# Altium PCB PCB1.PcbDoc (part 4 of 7)
Units mm, origin at the board's own origin, x right, y up, seen from the top; angles counter-clockwise.
Board outline 168 x 107.92 mm, 4 copper layers (Top Layer, POWER_LAYER, GND_LAYER, Bottom Layer), stack 1.182 mm thick; 507 components, 566 nets, 2495 pads, 1244 vias.
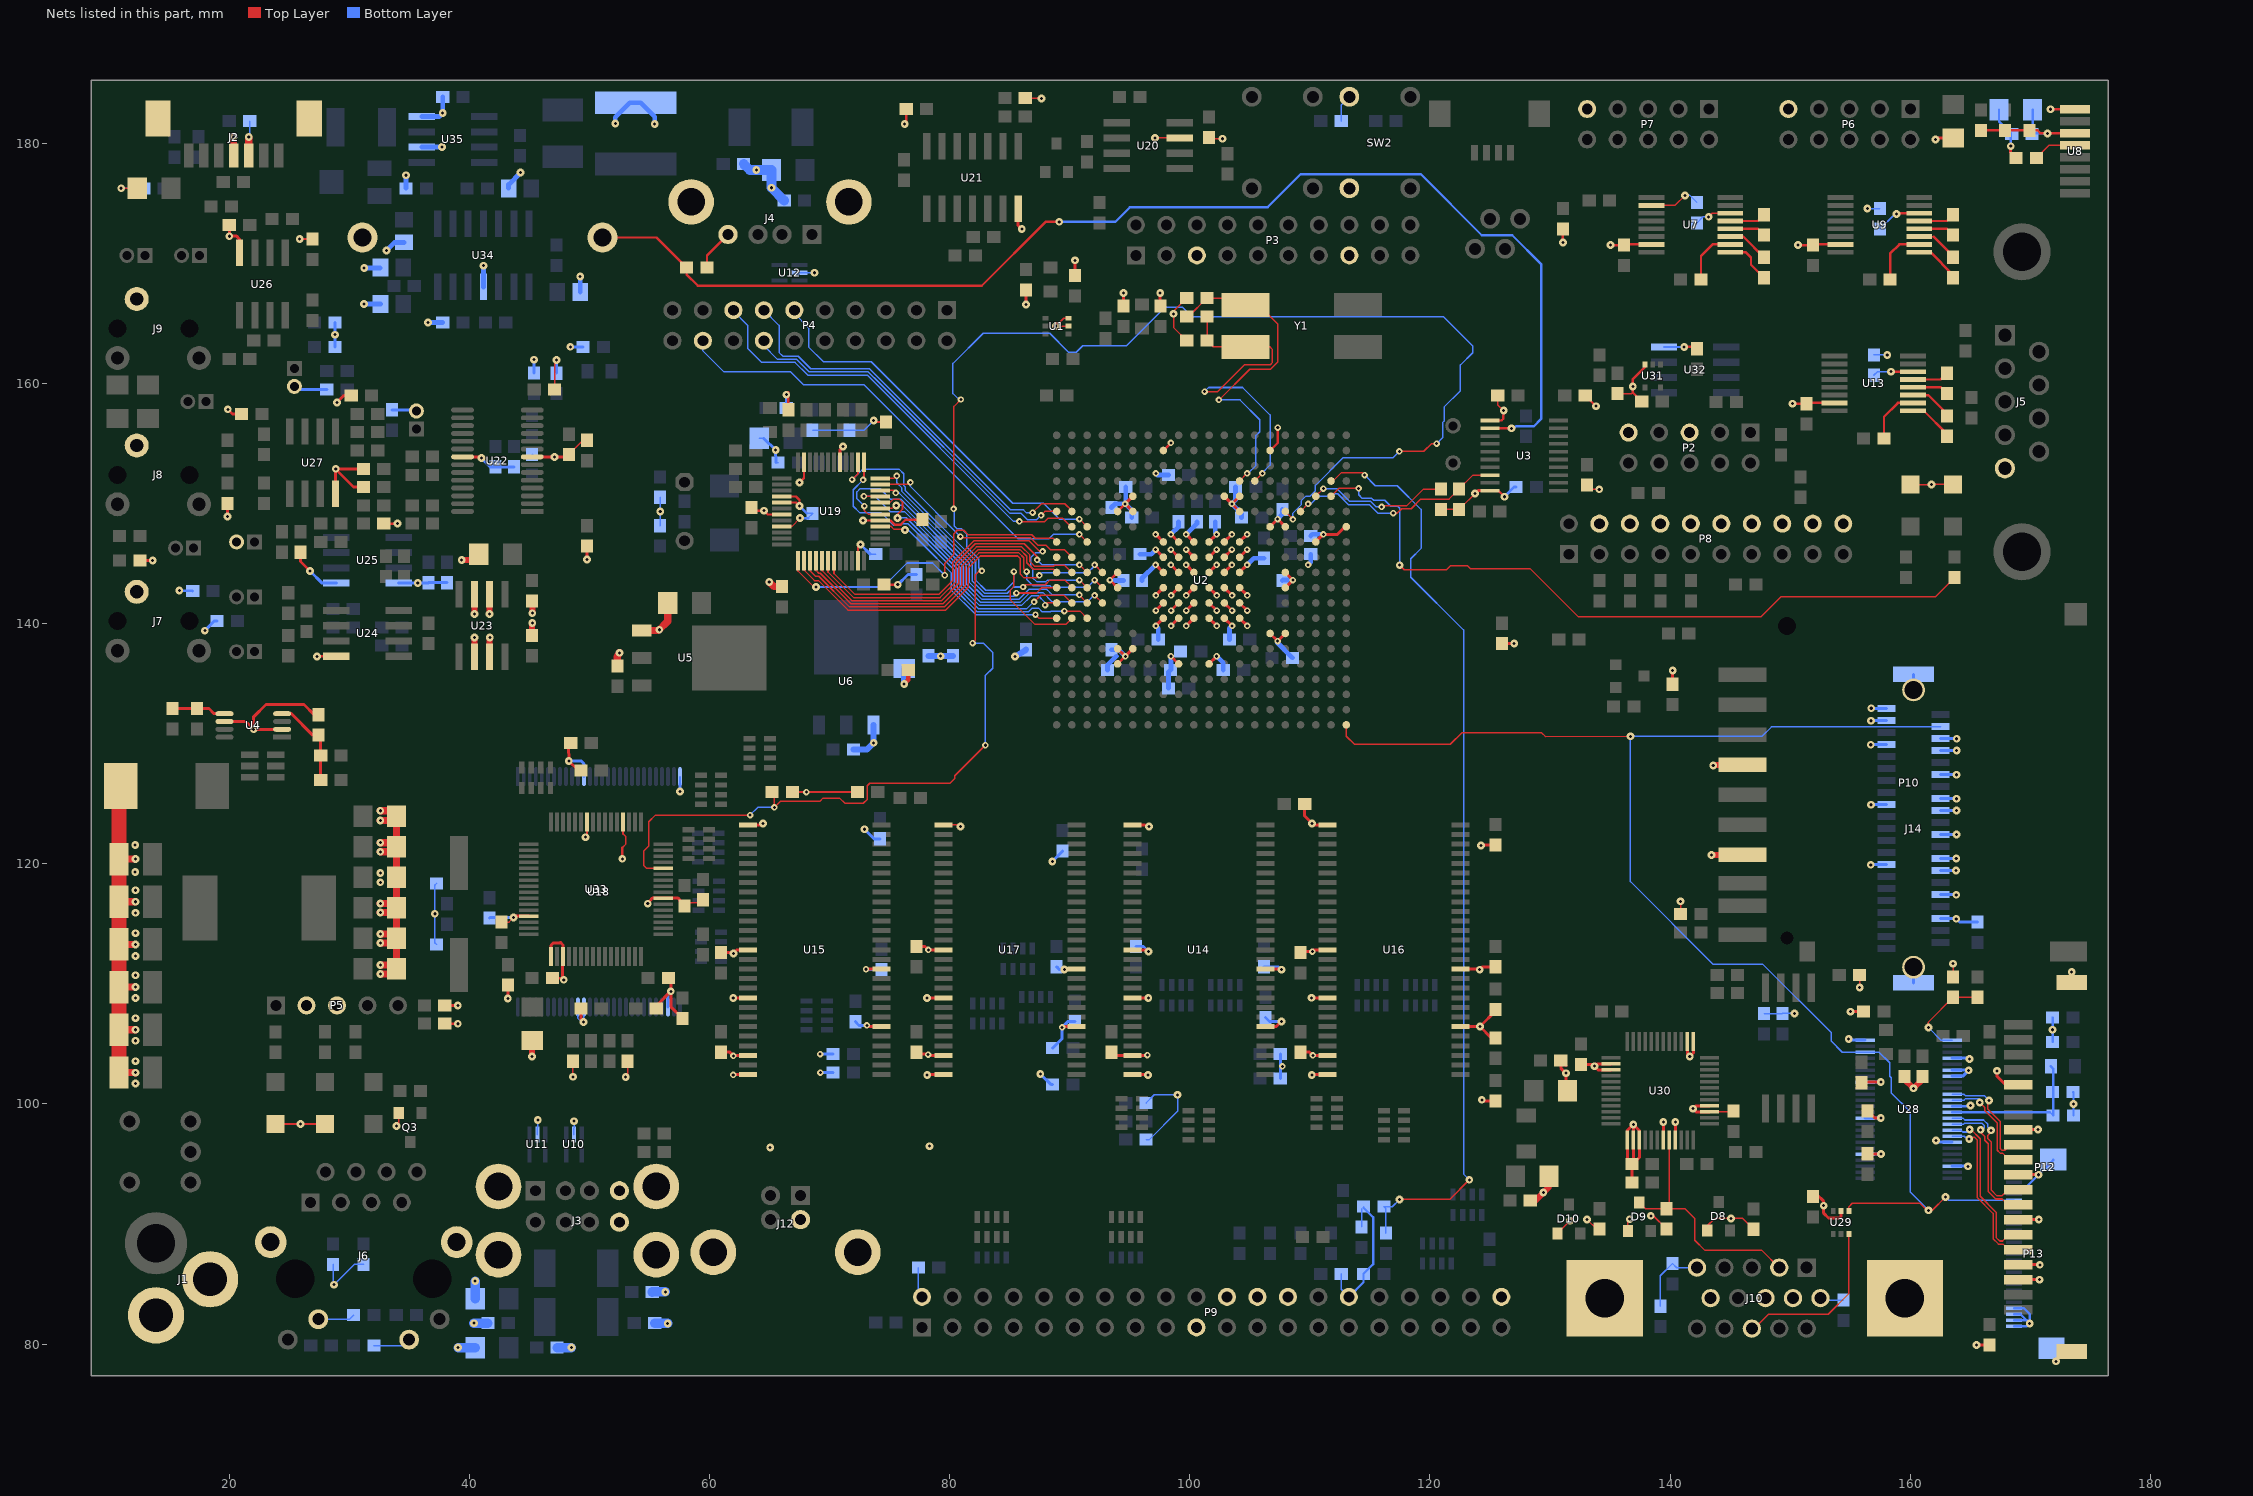
[diagram p6: the nets of this part, all layers, seen from the top]

## Via types
v1: diameter 0.54, hole 0.254, Top Layer to Bottom Layer, tented both sides, 504 vias
v2: diameter 0.65, hole 0.254, Top Layer to Bottom Layer, 387 vias
v3: diameter 0.65, hole 0.254, Top Layer to Bottom Layer, tented both sides, 325 vias
v4: diameter 0.54, hole 0.254, Top Layer to Bottom Layer, 25 vias
v5: diameter 1.27, hole 0.75, Top Layer to Bottom Layer, 2 vias
v6: diameter 0.65, hole 0.254, Top Layer to Bottom Layer, tented bottom, 1 vias

## Nets (pads, with @x,y where several pads share a name; then routed paths per layer and width w, separated by ;. In a path a pad name is that pad's centre, name@x,y a point inside that pad or via, vN(x,y) a via of type N, cw(c..) or ccw(c..) an arc to the next point about the centre after c; other vN are vias at no path point) (continued)
GND: B1.- C1.1 C2.1 C3.1 C4.1 C5.1 C6.1 C8.2 C9.1 C10.2 C11.1 C12.1 C13.2 C14.1 C15.2 C16.1 C17.1 C18.1 C19.2 C20.1 C21.2 C22.1 C24.2 C25.1 C26.2 C27.1 C28.1 C29.2 C30.1 C31.2 C32.1 C34.2 C35.1 C36.2 C37.1 C38.1 C39.1 C40.2 C41.1 C42.2 C43.1 C45.2 C46.1 C47.2 C48.1 C49.1 C50.1 C52.1 C53.1 C54.1 C55.1 C56.1 C57.1 C58.1 C59.1 C60.1 C61.1 C63.1 C64.1 C65.1 C66.1 C67.1 C68.1 C69.1 C70.1 C73.1 C74.1 C76.1 C77.1 C78.2 C82.1 C83.2 C87.1 C88.2 C89.1 C90.1 C91.1 C92.1 C93.1 C94.1 C95.1 C96.1 C97.1 C98.1 C99.2 C100.1 C101.2 C102.1 C103.2 C104.1 C105.2 C106.1 C107.2 C108.1 C109.2 C110.1 C111.2 C112.1 C113.2 C114.1 C115.2 C116.1 C117.2 C118.1 C119.2 C120.1 C121.2 C122.1 C123.2 C124.1 C125.2 C126.1 C127.1 C128.1 C129.1 C130.1 C131.1 C132.1 C133.1 C134.1 C135.1 C136.1 C137.1 C138.1 C139.1 C140.1 C141.1 C142.1 C144.1 C145.1 C146.1 C151.2 C152.1 C155.2 C156.1 C157.2 C158.1 C159.2 C160.2 C161.2 C162.2 C165.1 C166.2 C167.2 C168.2 C169.2 C170.2 C171.1 C172.1 C173.2 C175.1 C177.1 C178.1 C183.1 C184.2 C185.2 C186.2 C187.2 C188.2 C189.1 C190.2 C191.1 C192.2 C193.1 C194.2 C195.1 C196.2 C197.1 C198.1 C199.2 C200.2 C202.2 C203.2 C204.1 C206.2 C207.1 C208.1 C209.2 C210.2 C211.1 C212.2 C213.2 C214.2 C215.2 C216.2 C217.2 C218.2 C219.2 C220.2 C221.2 C222.2 C223.2 C224.1 C225.2 D1.2 D2.2 D3.1 D5.2 D6.2 D8.1 D9.1 D10.1 J1.2 J1.3 J2.3 J2.4 J2.8 J2.9 J3.4 J3.8 J3.9 J3.10 J3.11 J3.12 J4.4 J4.5 J4.6 J5.5 J6.10 J6.11 J6.13 J6.14 J7.3 J8.3 J9.3 J10.5 J10.6 J10.7 J10.8 J10.10 J10.16 J10.17 J12.4 J12.5 J12.6 J14.1 J14.3 J14.6 J14.7 J14.8 J14.12 J14.16 J14.17 J14.18 J14.22 J14.26 J14.27 J14.28 J14.32 J14.36 J14.42 J14.42_1 J14.43 J14.43_1 P2.5 P2.9 P3.5 P3.15 P5.2 P5.3 P6.9 P7.9 P8.4 P8.6 P8.8 P8.10 P8.12 P8.14 P8.16 P8.18 P8.20 P9.2 P9.19 P9.22 P9.24 P9.26 P9.30 P9.40 P10.3 P10.6 P12.3 P12.4 P12.7 P12.10 P12.13 P12.16 P12.21 P12.22 P13.2 P13.22 P13.23 P13.24 P13.25 P13.26 P13.27 Q3.2 R7.1 R8.1 R9.1 R10.1 R11.1 R14.1 R19.2 R20.2 R21.2 R22.2 R27.2 R32.2 R33.2 R34.2 R51.2 R61.2 R62.2 R64.1 R73.1 R79.1 R81.1 R83.2 R85.1 R95.1 R100.2 R101.1 R102.1 R103.1 R127.1 R131.1 R132.1 R133.1 R134.1 R135.1 R137.1 R138.1 R139.1 R140.1 R142.1 R145.1 R146.1 R148.1 R152.2 R154.1 R156.2 R157.2 R159.2 R160.1 R167.1 R169.1 SW2.2 SW2.3 U1.2 U1.3 U2.E5 U2.E6 U2.E10 U2.E11 U2.E15 U2.F6 U2.F15 U2.F16 U2.H8 U2.H9 U2.H10 U2.H11 U2.H12 U2.H13 U2.H19 U2.J5 U2.J8 U2.J9 U2.J10 U2.J11 U2.J12 U2.J13 U2.K8 U2.K9 U2.K10 U2.K11 U2.K12 U2.K13 U2.L5 U2.L8 U2.L9 U2.L10 U2.L11 U2.L12 U2.L13 U2.M8 U2.M9 U2.M10 U2.M11 U2.M12 U2.M13 U2.M16 U2.N8 U2.N9 U2.N10 U2.N11 U2.N12 U2.N13 U2.N15 U2.N16 U2.R7 U2.R14 U2.R19 U2.T7 U2.T10 U2.T11 U2.T14 U2.V13 U2.Y14 U3.1 U3.10 U4.2 U4.6 U5.1 U6.1 U7.10 U7.15 U8.8 U9.15 U10.2 U11.2 U12.2 U13.15 U14.6 U14.12 U14.28 U14.41 U14.46 U14.52 U14.54 U15.6 U15.12 U15.28 U15.41 U15.46 U15.52 U15.54 U16.6 U16.12 U16.28 U16.41 U16.46 U16.52 U16.54 U17.6 U17.12 U17.28 U17.41 U17.46 U17.52 U17.54 U18.12 U18.28 U18.31 U18.45 U18.46 U19.11 U19.17 U19.29 U19.35 U19.40 U19.41 U19.43 U19.45 U20.3 U21.7 U22.8 U22.21 U23.2 U23.3 U23.6 U23.7 U24.4 U25.4 U25.5 U26.4 U27.4 U28.5 U28.11 U28.17 U28.24 U28.28 U28.30 U28.31 U28.36 U28.42 U28.46 U29.2 U30.1 U30.2 U30.14 U30.15 U30.25 U30.26 U30.27 U30.31 U30.33 U30.39 U30.40 U31.3 U32.4 U33.1 U33.3 U33.23 U33.36 U33.42 U33.61 U34.11 U35.2 U35.4 | length 717.6
  Top Layer w0.127: v2(10.976,176.276) C59.1@12.316,176.276 ; D5.2@23.828,98.322 23.832,98.326 D6.2@27.94,98.326 ; v2(33.9,98.16) 34.102,98.362 Q3.2@34.102,99.244 ; R159.2@42.672,115.15 43.29,115.15 v2(43.66,115.52) ; R102.1@47.078,159.512 47.078,161.818 v2(47.24,161.98) ; U33.3@47.72,112.227 U33.3@47.78,112.287 ; C146.1@48.26,154.09 49.452,155.282 R19.2@49.784,155.282 ; R152.2@48.598,103.563 48.598,102.405 v2(48.6,102.26) ; v2@49.272,107.031 v2(49.482,106.821) ; v2(49.662,122.221) v2@49.78,122.339 ; 52.722,121.341 53.022,121.641 53.022,122.261 52.78,122.503 ; v2(53.002,102.241) 53.17,102.409 R156.2@53.17,103.563 ; C126.1@55.544,107.969 C126.1@55.544,108.163 ; R157.2@56.56,110.509 56.754,110.509 R157.2@56.762,110.501 ; C217.2@57.742,116.771 59.201,116.771 R160.1@59.436,117.006 ; U19.45@66.004,148.102 66.862,148.102 v2(67.52,148.8) ; R8.1@67.336,125.984 R20.2@72.302,125.984 ; v2@73.774,156.92 v2(73.66,156.92) 73.774,156.806 R51.2@74.676,156.806 ; v2(75.664,143.256) v2@75.7,143.22 ; v2(76.24,181.64) v2@76.366,181.766 ; U17.28@79.458,123.24 80.78,123.24 v2(80.9,123.12) ; C144.1@86.294,183.776 87.624,183.776 v2(87.64,183.76) ; v2(86.34,166.6) v2@86.36,166.62 ; U1.2@89.874,164.794 v2(88.846,164.794) 89.496,165.444 U1.3@89.874,165.444 ; 96.28,123.24 v2(96.6,123.12) ; v3(97.1,180.46) 97.107,180.467 U20.3@99.145,180.467 ; U2.H19@97.79,154.432 U2.H19@97.79,154.44 ; C1.1@99.734,163.576 99.734,163.586 98.64,164.68 v3(98.64,165.82) 98.62,166 C2.1@99.734,167.132 ; R64.1@101.6,180.506 101.706,180.4 v2(102.72,180.4) ; U2.R19@106.68,154.432 U2.R19@106.692,154.432 ; U2.V13@110.49,146.812 U2.V13@110.49,146.82 ; U2.Y14@112.922,148.082 U2.Y14@113.03,148.082 ; R10.1@120.904,149.518 R9.1@122.428,149.518 v2@123.992,151.082 ; R14.1@125.642,159.004 125.642,158.218 v2(126.14,157.76) ; D10.1@130.622,89.224 v2(131.658,90.26) ; C4.1@132.93,159.004 C4.1@132.936,159.004 ; v2(133.08,90.38) 133.886,89.574 R139.1@134.112,89.574 ; R7.1@133.096,151.55 133.446,151.2 v2(134.1,151.2) ; R154.1@135.636,159.17 136.824,159.17 136.9,159.246 ; C83.2@136.144,171.538 C83.2@136.209,171.603 ; U30.25@136.442,96.992 U30.25@136.442,97.782 ; D9.1@136.486,89.4 136.486,90.246 v2(136.64,90.4) ; U30.27@137.442,96.992 U30.27@137.442,97.778 ; U31.3@137.912,161.392 U31.3@137.912,161.594 ; v2(138.4,90.68) 138.594,90.68 R138.1@139.7,89.574 ; U7.10@138.457,174.853 140.413,174.853 v2(141.24,175.68) ; v2(139.44,98.5) v2@139.442,98.498 ; v2(140.44,98.5) v2@140.442,98.498 ; v2(140.88,116.88) 140.882,116.878 R95.1@140.882,115.824 ; C209.2@142.082,163.06 C209.2@142.24,162.902 ; D8.1@143.102,89.436 143.102,89.842 143.72,90.46 146.05,90.46 R137.1@146.956,89.554 ; U30.39@143.292,99.342 R148.1@145.228,99.342 ; v2@150.66,171.54 v2(150.662,171.538) ; R142.1@155.79,110.744 155.8,110.734 v2(155.8,109.7) ; D2.2@160.02,151.61 160.07,151.56 161.74,151.56 v2(161.79,151.61) D1.2@163.576,151.61 ; v2(163.56,111.68) 163.576,111.664 R140.1@163.576,110.578 ; v2(171.68,182.86) v2@171.692,182.848
  Top Layer w0.2: v2@19.812,148.968 v2(19.84,148.94) ; R131.1@19.812,149.998 R131.1@19.812,150.026 ; v2@19.978,172.282 19.978,172.242 v2@20.02,172.2 ; v2(25.846,172.046) C178.1@26.924,172.046 ; v2(27.28,137.28) U24.4@28.896,137.287 ; C167.2@32.854,148.336 33.996,148.336 v2(34,148.34) ; C41.1@37.934,106.68 v2(39.02,106.68) ; v2@49.78,122.339 U33.42@49.78,123.487 ; v2(52.722,120.421) 52.722,121.341 ; 52.78,122.503 U33.36@52.78,123.487 ; U33.23@56.127,117.137 U33.23@56.13,117.137 ; C5.1@59.778,169.672 59.778,170.684 J4.4@61.524,172.43 ; C216.2@63.5,149.694 63.774,149.42 v2(64.52,149.42) 64.838,149.102 U19.43@66.004,149.102 ; v2@64.52,149.36 v2@64.58,149.36 ; U19.41@66.004,150.102 67.178,150.102 v2(67.48,149.8) 67.48,150.3 67.178,150.602 U19.40@66.004,150.602 ; C136.1@66.548,157.822 v2@66.548,159.292 ; v2(67.48,151.76) 67.854,152.134 U19.35@67.854,153.452 ; U19.11@72.354,145.252 72.354,146.394 v2(72.56,146.6) ; v2(72.762,148.602) U19.17@74.204,148.602 75.058,148.602 75.4,148.26 75.92,148.26 76.32,148.66 C215.2@77.78,148.66 ; C135.1@74.51,143.256 v2(75.664,143.256) ; v2@76.366,181.766 C213.2@76.366,182.88 ; U2.H19@97.79,154.44 v1(98.42,155.07) ; U2.R19@106.692,154.432 107.32,155.06 v1(107.32,156.34) ; U3.1@125.008,156.932 125.952,156.932 126.1,157.08 v2(126.14,157.76) ; U3.10@125.008,151.082 125.698,151.082 v2(126.2,150.58) ; C190.2@128.358,91.948 C190.2@128.768,91.948 ; C193.1@129.924,93.104 C193.1@129.924,93.98 ; C18.1@131.064,172.886 131.064,171.776 v2(131.08,171.76) ; C4.1@132.936,159.004 v2(133.82,158.12) ; v2(135.04,171.54) C83.2@136.144,171.538 ; C83.2@136.209,171.603 U7.15@138.457,171.603 ; C210.2@137.65,158.496 136.9,159.246 136.9,160.38 U31.3@137.912,161.392 ; v2(141.18,163.06) C209.2@142.082,163.06 ; v2(150.19,158.33) C88.2@151.384,158.33 151.449,158.395 U13.15@153.697,158.395 ; v2(150.662,171.538) C78.2@151.892,171.538 151.957,171.603 U9.15@154.205,171.603 ; v2@171.692,182.848 U8.8@173.736,182.848
  Top Layer w0.25: R132.1@12.534,145.288 v2(13.6,145.28) ; U4.6@19.584,131.856 21.364,131.856 v2(22.014,131.206) ; v2(19.84,148.94) R131.1@19.84,149.998 ; v2(19.86,157.86) 20.24,157.48 C162.2@20.994,157.48 ; R127.1@19.978,173.228 19.978,172.282 v2(19.98,172.28) 20.6,172.28 20.84,172.04 U26.4@20.84,170.89 ; U4.2@24.384,131.206 v2(22.014,131.206) ; C171.1@25.908,145.962 25.908,145.192 v2(26.7,144.4) ; R32.2@27.432,132.422 27.058,132.422 26.2,133.28 23.04,133.28 22.014,132.254 v2(22.014,131.206) ; U27.4@28.829,150.816 v2@28.829,152.889 ; v2(28.96,158.44) 29.524,159.004 C168.2@30.138,159.004 ; C175.1@31.154,151.384 30.334,151.384 v2@28.829,152.889 ; C177.1@31.154,152.908 v2(28.848,152.908) v2@28.829,152.889 ; C39.1@37.934,108.204 v2(39.016,108.204) v2@39.06,108.16 ; U22.21@39.412,153.902 40.878,153.902 v2(40.98,153.8) ; U23.7@41.688,137.082 U23.7@41.687,137.242 ; v2(43.18,108.78) C212.2@43.18,109.894 ; v2(43.66,115.52) 43.777,115.637 U33.61@44.93,115.637 ; v2(45.2,103.96) v2@45.212,103.972 ; U22.8@45.212,153.902 48.072,153.902 C146.1@48.26,154.09 ; U33.1@46.78,112.287 46.78,113.212 46.982,113.414 47.516,113.414 47.562,113.461 47.78,113.243 U33.3@47.78,112.287 ; C218.2@47.189,110.509 v2@47.72,110.46 ; U33.3@47.72,112.227 v2@47.72,110.46 ; v2(47.84,110.34) v2@47.72,110.46 ; C129.1@48.09,129.813 48.24,129.82 v2(48.262,128.561) 49.062,127.781 C128.1@49.272,127.781 ; v2@49.272,107.03 C124.1@49.272,107.969 ; v2(49.78,145.36) 49.78,146.466 C20.1@49.784,146.47 ; v2(54.84,116.68) 55.217,117.137 57.376,117.137 C217.2@57.912,116.498 ; C126.1@55.544,108.163 v2(56.762,109.381) ; R157.2@56.762,110.501 56.762,108.099 C127.1@57.742,107.119 ; C100.1@60.96,104.306 61.674,104.306 v4(61.98,104) 62.02,104.04 U15.52@63.202,104.04 ; C99.2@60.96,112.61 61.91,112.61 v2(61.98,112.54) 62.28,112.84 U15.41@63.202,112.84 ; v4(61.96,102.42) 62.02,102.44 U15.54@63.202,102.44 ; v2(61.96,108.82) 61.98,108.84 U15.46@63.202,108.84 ; U15.28@63.202,123.24 64.32,123.24 v2(64.44,123.36) ; U19.29@70.854,153.452 70.854,154.514 v2(71.1,154.76) ; v4@73.04,111.24 U15.12@74.302,111.24 ; v4(73.1,106.54) 73.2,106.44 U15.6@74.302,106.44 ; C106.1@77.216,104.306 77.362,104.16 78.2,104.16 78.32,104.04 U17.52@79.458,104.04 ; C105.2@77.216,113.118 77.942,113.118 v4(78.22,112.84) U17.41@79.458,112.84 ; v2(78.1,108.82) 78.12,108.84 U17.46@79.458,108.84 ; v2(78.12,102.42) 78.26,102.44 U17.54@79.458,102.44 ; U21.7@85.698,174.572 85.698,173.182 v2(86,172.88) ; v2(86.34,166.6) 86.34,167.786 C53.1@86.36,167.806 ; v4(89.36,106.38) 89.42,106.44 U17.6@90.558,106.44 ; v2@90.4,170.3 v2(90.424,170.276) C55.1@90.424,168.998 ; C112.1@93.472,104.306 93.738,104.04 96.4,104.04 v4(96.46,104.06) ; U2.E5@93.98,136.652 U2.F6@95.25,137.922 95.25,137.914 v1(94.62,137.284) 94.618,137.284 U2.E6@93.98,137.922 ; U2.E10@93.98,143.002 93.978,143.002 v1(93.34,143.64) 93.348,143.64 U2.E11@93.98,144.272 ; U2.E15@93.98,149.352 U2.F16@95.25,150.622 95.242,150.622 v1(94.61,149.99) 94.612,149.99 U2.F15@95.25,149.352 ; v2(94.48,167.54) 94.488,167.532 C52.1@94.488,166.458 ; U14.54@95.206,102.44 96.38,102.44 v2(96.52,102.42) ; U14.41@95.206,112.84 96.42,112.84 v2(96.56,112.7) ; U14.46@95.22,108.82 v2(96.54,108.82) ; v1(97.15,144.91) 97.788,144.272 U2.H11@97.79,144.272 ; v1(97.15,146.18) 97.788,145.542 U2.H12@97.79,145.542 ; v1(97.15,147.45) 97.788,146.812 U2.H13@97.79,146.812 ; v1(97.16,139.824) 97.79,140.454 U2.H8@97.79,140.462 ; v1(97.16,141.094) 97.79,141.724 U2.H9@97.79,141.732 ; v1(97.16,142.364) 97.79,142.994 U2.H10@97.79,143.002 ; v2(97.528,167.54) C54.1@97.536,166.458 ; v1(98.42,137.29) 99.058,136.652 U2.J5@99.06,136.652 ; v1(98.42,144.91) 99.058,144.272 U2.J11@99.06,144.272 ; v1(98.42,146.18) 99.058,145.542 U2.J12@99.06,145.542 ; v1(98.42,147.45) 99.058,146.812 U2.J13@99.06,146.812 ; v1(98.43,139.824) 99.06,140.454 U2.J8@99.06,140.462 ; v1(98.43,141.094) 99.06,141.724 U2.J9@99.06,141.732 ; v1(98.43,142.364) 99.06,142.994 U2.J10@99.06,143.002 ; v1(99.69,144.91) 100.328,144.272 U2.K11@100.33,144.272 ; v1(99.69,146.18) 100.328,145.542 U2.K12@100.33,145.542 ; v1(99.69,147.45) 100.328,146.812 U2.K13@100.33,146.812 ; v1(99.7,139.824) 100.33,140.454 U2.K8@100.33,140.462 ; v1(99.7,141.094) 100.33,141.724 U2.K9@100.33,141.732 ; v1(99.7,142.364) 100.33,142.994 U2.K10@100.33,143.002 ; U2.L5@101.6,136.652 101.6,136.66 v1(102.23,137.29) ; U2.L8@101.6,140.462 101.602,140.462 v1(102.24,139.824) ; U2.L9@101.6,141.732 101.602,141.732 v1(102.24,141.094) ; U2.L10@101.6,143.002 101.602,143.002 v1(102.24,142.364) ; U2.L11@101.6,144.272 101.6,144.28 v1(102.23,144.91) ; U2.L12@101.6,145.542 101.6,145.55 v1(102.23,146.18) ; U2.L13@101.6,146.812 101.6,146.82 v1(102.23,147.45) ; U2.M8@102.87,140.462 102.872,140.462 v1(103.51,139.824) ; U2.M9@102.87,141.732 102.872,141.732 v1(103.51,141.094) ; U2.M10@102.87,143.002 102.872,143.002 v1(103.51,142.364) ; U2.M11@102.87,144.272 102.87,144.28 v1(103.5,144.91) ; U2.M12@102.87,145.542 102.87,145.55 v1(103.5,146.18) ; U2.M13@102.87,146.812 102.87,146.82 v1(103.5,147.45) ; U2.M16@102.87,150.622 U2.N15@104.14,149.352 104.138,149.352 v1(103.5,149.99) 103.508,149.99 U2.N16@104.14,150.622 ; U2.N8@104.14,140.462 104.142,140.462 v1(104.78,139.824) ; U2.N9@104.14,141.732 104.142,141.732 v1(104.78,141.094) ; U2.N10@104.14,143.002 104.142,143.002 v1(104.78,142.364) ; U2.N11@104.14,144.272 104.14,144.28 v1(104.77,144.91) ; U2.N13@104.14,146.812 104.14,146.82 v1(104.77,147.45) ; U2.N12@104.162,145.542 U2.N12@104.14,145.542 104.14,145.55 v1(104.77,146.18) ; U14.6@106.306,106.44 107.2,106.44 v2(107.62,106.86) ; U14.12@106.306,111.24 107.52,111.24 v2(107.64,111.18) ; U2.R7@106.68,139.192 107.31,138.562 v1(107.31,138.56) 107.942,139.192 U2.T7@107.95,139.192 ; U2.R14@106.68,148.082 106.68,148.09 v1(107.31,148.72) 107.312,148.72 U2.T14@107.95,148.082 ; U2.T10@107.95,143.002 108.58,143.632 v1(108.58,143.64) 107.95,144.27 U2.T11@107.95,144.272 ; C118.1@109.22,104.306 109.974,104.306 v4(110.24,104.04) U16.52@111.462,104.04 ; C117.2@109.22,112.61 109.22,112.66 109.2,112.68 v4(110.2,112.68) 110.36,112.84 U16.41@111.462,112.84 ; C110.1@109.562,124.968 109.562,123.978 110.3,123.24 U16.28@111.462,123.24 ; v2(110.12,108.84) U16.46@111.462,108.84 ; v2(110.16,102.4) 110.28,102.44 U16.54@111.462,102.44 ; U2.V13@110.49,146.82 v1(111.12,147.45) 112.29,147.45 U2.Y14@112.922,148.082 ; U16.6@122.562,106.44 v2(124.16,106.44) ; U16.12@122.562,111.24 124.08,111.24 v2(124.14,111.18) 124.378,111.418 C121.2@125.476,111.418 ; v2@123.992,151.082 U3.10@125.008,151.082 ; v2(124.24,121.52) 124.298,121.578 C116.1@125.476,121.578 ; v2(124.32,100.34) 124.418,100.242 C119.2@125.476,100.242 ; C120.1@125.476,105.498 125.102,105.498 v2(124.16,106.44) ; C61.1@125.476,107.862 125.476,107.756 v2(124.16,106.44) ; C28.1@125.984,138.342 v2(127.018,138.342) v2@127.04,138.32 ; C199.2@131.32,103.21 C199.2@130.898,103.632 130.898,102.982 v2(131.32,102.56) 131.32,101.22 C69.1@131.448,101.092 ; C200.2@132.588,103.29 133.55,103.29 133.998,102.842 U30.15@135.092,102.842 ; v2(133.7,103.14) 133.902,103.342 U30.14@135.092,103.342 ; C203.2@136.442,95.042 U30.25@136.442,96.992 ; U30.25@136.442,97.782 v2(136.94,98.28) v2@136.942,98.278 ; C206.2@136.818,93.472 C203.2@136.818,94.996 136.942,95.12 U30.26@136.942,96.992 v2@136.942,98.278 ; C203.2@137.28,95.38 137.442,95.542 U30.27@137.442,96.992 ; U30.27@137.442,97.778 v2@136.942,98.278 ; U30.31@139.442,96.992 v2@139.442,98.498 ; C145.1@140.208,134.962 140.208,136.088 v2(140.22,136.1) ; U30.33@140.442,96.992 v2@140.442,98.498 ; U30.2@141.442,105.192 141.442,104.138 v2(141.64,103.94) 141.942,104.242 U30.1@141.942,105.192 ; U30.39@143.292,99.342 142.178,99.342 v2(141.92,99.6) 142.162,99.842 U30.40@143.292,99.842 ; R148.1@145.228,99.342 R148.1@145.288,99.402 ; C187.2@152.234,92.456 152.8,91.89 152.8,90.899 153.202,90.497 154.137,90.497 154.25,90.61 U29.2@154.25,91.082 ; v2(155.04,107.68) 155.056,107.696 C194.2@156.122,107.696 ; C192.2@155.956,101.766 156.01,101.82 v2(157.56,101.82) ; C195.1@156.464,95.846 157.554,95.846 v2(157.58,95.82) ; C189.1@156.464,99.402 157.046,98.82 v2(157.56,98.82) ; v2(162.12,180.34) 162.244,180.464 C73.1@163.576,180.464 ; v2(165.54,79.92) 165.542,79.922 C186.2@166.624,79.922 ; v2(167.24,102.76) 167.24,102.3 167.93,101.61 P12.16@169.013,101.61 ; v2(168.38,179.78) 168.38,179.258 R34.2@168.822,178.816 ; P12.3@169.013,85.36 v2(170.78,85.36) ; P12.4@169.013,86.61 170.79,86.61 v2(170.8,86.6) ; P12.7@169.013,90.36 v2(170.72,90.36) ; P12.10@169.013,94.11 170.69,94.11 v2(170.7,94.1) ; P12.13@169.013,97.86 v2(170.66,97.86)
  Top Layer w0.254: U14.28@95.206,123.24 96.28,123.24
  Top Layer w0.4: v2(76.2,134.98) 76.542,135.322 C32.1@76.542,136.144
  Top Layer w0.5: v2(39.34,145.32) 40.288,145.32 C68.1@40.764,145.796 ; U23.6@40.398,137.242 40.398,138.858 v2(40.4,138.86) ; U23.3@40.398,142.442 40.398,140.822 v2(40.4,140.82) ; v2(41.66,140.82) 41.668,140.828 U23.2@41.668,142.442 ; U23.7@41.668,137.242 41.668,138.848 v2(41.68,138.86) ; v2@45.212,103.972 C211.1@45.212,105.28 ; C151.2@45.212,139.026 45.212,140.052 v2(45.22,140.06) ; C155.2@45.212,141.898 45.22,141.89 v2(45.22,140.88) ; C190.2@128.768,91.948 C193.1@129.924,93.104 ; v2(143.46,120.74) 143.467,120.747 P10.6@146.043,120.747 ; v2(143.6,128.2) 143.647,128.247 P10.3@146.043,128.247 ; C204.1@159.512,102.274 159.512,102.068 v2(160.28,101.3) 161.036,102.056 C202.2@161.036,102.274
  Top Layer w0.6: C38.1@10.792,102.616 12.144,102.616 v2(12.16,102.6) ; C50.1@10.792,106.172 12.152,106.172 v2(12.16,106.18) ; C49.1@10.792,109.728 12.148,109.728 v2(12.16,109.74) ; C17.1@10.792,113.284 12.156,113.284 v2(12.16,113.28) ; C6.1@10.792,116.84 v2(12.16,116.84) ; C56.1@10.792,120.396 12.156,120.396 v2(12.16,120.4) ; v2(20.34,180.56) J2.4@20.342,178.988 ; J2.3@21.592,178.988 v2(21.6,180.54) ; v2(32.56,110.82) 33.48,110.82 C57.1@33.912,111.252 ; v2(32.56,111.58) 33.584,111.58 C57.1@33.912,111.252 ; v2(32.56,113.4) 33.52,113.4 C67.1@33.912,113.792 33.544,114.16 v2(32.56,114.16) ; v2(32.56,115.94) 33.52,115.94 C152.1@33.912,116.332 33.544,116.7 v2(32.56,116.7) ; v2(32.56,121) 33.5,121 C197.1@33.912,121.412 33.564,121.76 v2(32.56,121.76) ; v2(32.56,123.6) 33.56,123.6 C70.1@33.912,123.952 ; v2(32.56,124.42) 33.444,124.42 C70.1@33.912,123.952 ; C60.1@52.308,136.726 52.3,137.28 v2(52.48,137.58) ; U5.1@54.34,139.432 55.732,139.432 56.512,140.212 C58.1@56.512,141.732 ; v2(64.96,143.48) 65.35,143.09 C10.2@66.04,143.09 ; C57.1@33.912,111.252 C70.1@33.912,123.952
  Top Layer w1.27: C38.1@10.792,102.616 10.792,126.362 D3.1@10.922,126.492
  Bottom Layer w0.127: v2@10.96,176.26 v2(10.976,176.276) R27.2@12.866,176.276 ; v2(21.6,180.54) 21.678,180.618 R33.2@21.678,181.864 ; J6.10@27.395,82.066 30,82.066 R62.2@30.33,82.396 ; C142.1@28.64,86.626 28.64,85 v2(28.7,84.94) 30.386,86.626 C141.1@31.18,86.626 ; R61.2@32.03,79.856 34.457,79.856 J6.11@34.965,80.364 ; C207.1@37.25,113.284 37.1,113.434 37.1,118.214 C208.1@37.25,118.364 ; R103.1@45.212,154.102 45.412,153.902 v2(47.06,153.902) ; U11.2@45.644,97.447 v2(45.68,98.66) ; U10.2@48.692,97.447 v2(48.7,98.56) v2@48.7,98.54 ; U18.46@49.026,108.073 49.026,107.117 49.322,106.821 v2(49.482,106.821) 49.482,107.165 ; 49.526,107.165 U18.45@49.526,108.073 ; C132.1@55.88,148.17 C130.1@55.88,150.534 ; 56.526,109.145 v2(56.762,109.381) ; U18.28@57.526,126.637 U18.28@57.526,127.273 ; C134.1@64.132,155.448 C134.1@64.472,155.448 ; C137.1@65.52,153.42 65.524,153.416 C137.1@65.698,153.416 ; v2(66.38,159.08) v2@66.382,159.126 ; U12.2@67.475,169.24 v2(68.72,169.24) ; C138.1@68.094,149.186 C138.1@68.58,149.186 C138.1@68.194,148.8 ; C140.1@68.58,156.122 72.862,156.122 v2(73.66,156.92) ; C133.1@73.364,145.796 C133.1@73.826,145.796 ; R83.2@77.382,86.36 77.382,84.23 P9.2@77.688,83.924 ; R21.2@96.354,97.028 96.628,97.028 98.98,99.38 v2(98.98,100.76) 97.038,100.76 R22.2@96.354,100.076 ; R85.1@112.61,85.852 112.61,84.562 P9.30@113.248,83.924 ; R73.1@112.61,181.864 112.61,183.222 SW2.2@113.284,183.896 ; R79.1@114.3,89.75 R11.1@114.3,91.274 ; R11.1@114.466,91.354 R11.1@114.466,91.44 ; R134.1@139.192,83.146 139.192,85.686 R133.1@140.208,86.702 140.55,86.36 J10.5@142.24,86.36 ; v2@141.176,163.056 v2(141.18,163.06) ; v2(141.24,175.68) 141.654,175.68 C76.1@142.24,175.094 ; R146.1@147.828,107.53 R145.1@149.352,107.53 149.362,107.54 v2(150.36,107.54) ; J10.6@152.527,83.82 152.693,83.654 R135.1@154.432,83.654 ; v2(156.434,174.586) C82.1@157.48,174.586 ; C87.1@156.972,162.394 v2(158.094,162.394) ; v2@157.55,101.81 v2(157.56,101.82) ; v2@164.95,99.81 v2(165.02,99.88)
  Bottom Layer w0.2: v2(66.38,159.08) C131.1@66.382,157.988 ; v2(67.48,149.8) C138.1@68.094,149.186 ; v2(67.52,148.8) C138.1@68.194,148.8 ; P9.30@113.248,83.924 114.466,85.142 R81.1@114.466,85.852 115.26,86.646 115.26,90.56 R11.1@114.466,91.354 ; U32.4@139.498,163.056 v2@141.176,163.056 ; U28.36@163.504,99.81 v2@164.95,99.81 ; C74.1@167.404,182.812 167.404,181.838 168.38,180.862 v2(168.38,179.78) ; P13.25@168.656,81.472 169.712,81.472 v2(169.96,81.72) ; P13.24@168.656,81.972 169.708,81.972 ; P13.23@168.656,82.472 169.208,82.472 v2(169.96,81.72) ; P13.22@168.656,82.972 169.488,82.972 169.96,82.5 v2(169.96,81.72) ; P13.2@168.656,92.972 169.572,92.972 171.906,95.306 P13.26@171.906,95.372 ; C191.1@171.87,105.156 C188.2@171.87,107.188 ; C196.2@173.568,100.984 173.61,100.942 C198.1@173.61,99.048
  Bottom Layer w0.25: v2(15.82,142.76) R100.2@16.93,142.748 ; v2(17.94,139.42) 18.708,140.208 R101.1@18.962,140.208 ; C170.2@25.4,159.778 25.666,159.512 C172.1@28.106,159.512 ; v2(26.7,144.4) 27.717,143.383 U25.5@28.896,143.383 ; C183.1@28.79,163.068 C184.2@28.79,165.1 ; C159.2@33.528,157.822 35.46,157.822 C161.2@35.56,157.722 ; U25.4@34.096,143.383 36.537,143.383 C158.1@36.576,143.422 C156.1@38.1,143.422 ; v2(40.98,153.8) 41.706,153.074 C160.2@43.688,153.074 ; C214.2@41.656,115.482 41.694,115.52 v2(43.66,115.52) ; C166.2@45.364,160.894 v2(45.364,161.996) ; v2(47.24,161.98) C165.1@47.244,160.87 ; v2(48.262,128.561) 49.302,128.561 49.526,128.337 U18.12@49.526,127.273 ; v2(48.388,163.068) C173.2@49.442,163.068 ; U18.31@56.526,108.073 56.526,109.145 ; v2(57.52,126.02) 57.522,126.341 U18.28@57.526,126.637 ; C134.1@64.472,155.448 v2(65.5,154.48) C137.1@65.52,153.42 ; v4(69.2,104.14) C122.1@70.27,104.14 ; v4(69.22,102.6) 70.254,102.6 C101.2@70.27,102.616 ; C102.1@72.136,106.846 72.442,106.54 v4(73.1,106.54) ; v2(72.56,146.6) C133.1@73.364,145.796 ; v2(72.9,122.88) 73.694,122.086 C98.1@74.168,122.086 ; v4(73.02,111.22) 73.05,111.19 C103.2@74.302,111.19 ; v2(75.664,143.256) 76.514,144.106 C25.1@77.216,144.106 ; v2(87.54,102.5) 88.46,101.6 C107.2@88.558,101.6 ; v2(88.54,120.2) C104.1@89.408,121.07 C104.1@89.408,121.07 ; C125.2@88.558,104.648 89.36,105.45 v4(89.36,106.38) 89.826,106.846 C109.2@90.424,106.846 ; C108.1@88.9,111.418 89.118,111.2 v2(89.54,111.2) ; C111.2@95.504,113.118 96.142,113.118 v2(96.56,112.7) ; C114.1@106.172,111.418 107.342,111.418 v2(107.64,111.18) ; C115.2@106.306,107.19 106.636,106.86 v2(107.62,106.86) ; C113.2@107.53,102.108 107.53,102.95 v4(107.7,103.12) 107.53,103.29 C123.2@107.53,104.14 ; v2(126.2,150.58) 127.004,151.384 C3.1@127.166,151.384 ; v2(154.88,105.42) 154.99,105.31 U28.24@156.254,105.31 ; U28.5@156.254,95.81 v2@157.57,95.81 ; U28.11@156.254,98.81 157.55,98.81 v2(157.56,98.82) ; U28.17@156.254,101.81 v2@157.55,101.81 ; v2(156.72,119.92) 156.736,119.936 J14.27@158.036,119.936 ; v2(156.72,129.92) 156.736,129.936 J14.7@158.036,129.936 ; v2(156.74,124.92) 156.756,124.936 J14.17@158.036,124.936 ; v2(156.74,131.92) 156.756,131.936 J14.3@158.036,131.936 ; v2@156.78,132.96 v2(156.76,132.96) J14.1@158.036,132.936 ; J14.43_1@160.286,110.086 J14.43@160.286,111.386 ; J14.42@160.286,134.486 J14.42_1@160.286,135.786 ; v2(162.16,96.94) 162.29,96.81 U28.42@163.504,96.81 ; J14.36@162.536,115.436 163.824,115.436 164.11,115.15 C185.2@165.608,115.15 ; J14.32@162.536,117.436 163.824,117.436 v2(163.84,117.42) ; J14.28@162.536,119.436 v2(163.824,119.436) v2@163.86,119.4 ; J14.26@162.536,120.436 163.836,120.436 v2(163.84,120.44) ; J14.22@162.536,122.436 v2(163.864,122.436) v2@163.9,122.4 ; J14.18@162.536,124.436 163.856,124.436 v2(163.86,124.44) ; J14.16@162.536,125.436 163.844,125.436 v2(163.86,125.42) ; J14.12@162.536,127.436 163.844,127.436 v2(163.86,127.42) ; J14.8@162.536,129.436 163.876,129.436 v2(163.88,129.44) ; J14.6@162.536,130.436 163.864,130.436 v2(163.88,130.42) ; U28.46@163.504,94.81 164.81,94.81 v2(164.82,94.8) ; U28.31@163.504,102.31 164.39,102.31 v2(164.88,102.8) 164.87,102.81 U28.30@163.504,102.81 ; U28.28@163.504,103.81 164.87,103.81 v2(164.94,103.74)
  Bottom Layer w0.4: v2(31.196,166.624) C223.2@32.578,166.624 ; v2(31.22,169.64) C220.2@32.558,169.624 ; v2(33.08,171.1) 33.75,171.77 C219.2@34.544,171.77 ; v2(34.7,177.36) 34.71,177.35 C224.1@34.71,176.276 ; U35.2@36.008,179.705 v2(37.695,179.705) v2@37.72,179.68 ; U35.4@36.008,182.245 37.465,182.245 v2(37.758,182.538) R169.1@37.758,183.896 ; v2(36.54,165.1) R167.1@37.758,165.1 ; U34.11@41.148,168.063 v2(41.148,169.828) ; C221.2@43.246,176.276 43.246,176.586 v2(44.24,177.58) ; C222.2@49.21,167.64 v2(49.21,168.93) ; v2(52.14,181.68) 52.14,182.18 53.358,183.398 54.242,183.398 55.42,182.22 v2(55.42,181.64) ; C43.1@93.13,136.144 93.13,136.53 C24.2@93.884,137.284 ; v1@93.382,143.598 C29.2@94.488,143.598 ; C24.2@93.472,137.834 94.07,137.834 v1(94.62,137.284) ; C15.2@93.472,149.694 93.768,149.99 v1(94.61,149.99) 95.162,149.438 C42.2@95.162,148.844 ; v1@94.654,150.034 C11.1@94.654,151.384 ; C16.1@95.846,145.796 96.766,145.796 v1(97.15,146.18) ; C35.1@96.012,143.598 96.012,143.772 v1(97.15,144.91) ; v1(97.16,139.824) 97.37,139.614 C14.1@97.37,138.684 ; v1(97.16,152.524) 97.284,152.4 C26.2@98.21,152.4 ; C19.2@98.21,134.62 98.21,135.968 98.42,136.178 v1(98.42,137.29) ; v1(98.42,147.45) 99.06,148.09 C34.2@99.06,148.502 ; v1(99.69,147.45) 100.584,148.344 C45.2@100.584,148.502 ; C12.1@102.108,148.502 102.108,147.572 v1(102.23,147.45) ; v1(102.23,137.29) 102.782,136.738 C36.2@102.782,136.144 ; C27.1@103.29,138.684 103.29,139.604 v1(103.51,139.824) ; C31.2@103.798,151.384 103.798,150.288 v1(103.5,149.99) 104.306,149.184 C22.1@104.306,148.844 ; v1(104.77,144.91) 105.314,145.454 C37.1@106.172,145.454 ; v1(107.31,138.56) 107.31,138.396 C8.2@108.546,137.16 ; v1(107.31,148.72) 107.696,149.106 C9.1@107.696,149.518 ; C40.2@107.696,143.598 107.738,143.64 v1(108.58,143.64) ; v1(109.85,144.91) 110.07,145.13 C30.1@110.07,145.796 ; C46.1@110.07,147.32 110.2,147.45 v1(111.12,147.45)
  Bottom Layer w0.5: C65.1@71.97,129.54 73.12,129.54 v2(73.66,130.08) U6.1@73.66,131.572 ; v2(76.2,134.98) C63.1@76.2,136.268 ; C66.1@78.232,137.326 C47.2@80.264,137.326 79.274,137.326 v2(79.24,137.3) ; v2(85.44,137.26) C48.1@86.36,137.834
  Bottom Layer w0.8: v2(39.04,79.7) C93.1@40.464,79.7 ; v2(40.368,81.732) C95.1@41.522,81.732 ; C92.1@40.464,83.764 v2(40.464,85.236) ; C96.1@47.286,79.7 v2(48.48,79.7) ; C90.1@55.206,84.328 v2(56.3,84.34) ; C89.1@55.414,81.732 v2(56.5,81.72) ; C91.1@62.826,178.308 63.334,177.8 C94.1@65.148,177.8 v2(65.148,176.318) C97.1@66.206,175.26
  other v1: 68.06,125.98
  other v2: 172.16,78.56 145.08,90.46 152.8,91.52 129.44,92.62 65.04,96.38 78.3,96.48 25.9,98.326 173.61,100 12.16,101.7 12.16,103.56 12.16,105.26 171.87,106.18 12.16,107.14 12.16,108.82 12.16,110.72 173.46,111 12.16,112.32 12.16,114.22 163.84,115.42 12.16,115.92 12.16,117.8 32.56,118.46 32.56,119.24 12.14,119.32 12.14,121.58 110.18,123.36 55.8,139.5 35.68,143.383 55.88,149.34 123.76,150.86 136.9,159.76 28.79,164.08 63.88,177.8
  other v3: 37.1,115.84
  other v4: 78.2,104.1
GREEN: D9.3 J10.2 R138.2 U30.32 | length 20.8
  Top Layer w0.127: D9.3@137.436,91.8 137.962,91.274 141.246,91.274 142.06,90.46 142.06,88.64 142.9,87.8 147.658,87.8 J10.2@149.098,86.36 ; R138.2@139.7,91.274 139.942,91.516 U30.32@139.942,96.992
GRLED: R4.2 U2.W16 | length 61.4
  Top Layer w0.127: U2.W16@111.76,150.622 111.762,150.622 112.42,151.28 v1(114.06,151.28) ; v3(117.48,144.88) 117.86,144.5 121.38,144.5 121.72,144.84 123.12,144.84 123.36,144.6 128.341,144.6 132.341,140.6 147.6,140.6 149.246,142.246 162.104,142.246 R4.2@163.716,143.858
  Bottom Layer w0.127: v1(114.06,151.28) 114.06,150.74 114.34,150.46 115.138,150.46 115.318,150.28 116.24,150.28 116.74,149.78 117.32,149.78 117.48,149.62 v3(117.48,144.88)
HSYNC: J14.4 P13.4 U2.Y1 U28.22 U29.1 | length 120.9
  Top Layer w0.127: U2.Y1@113.03,131.572 113.03,130.633 113.706,129.957 121.697,129.957 122.666,130.926 129.294,130.926 129.62,130.6 v3(136.7,130.62) ; U29.1@154.9,91.082 154.9,91.44 155.18,91.72 160.82,91.72 161.4,91.14 161.84,91.14 v3(162.94,92.24)
  Bottom Layer w0.127: v3(161.52,91.14) 160,92.66 160,99.339 158.42,100.919 158.42,102.18 158.3,102.3 158.3,103.42 157.41,104.31 154.35,104.31 153.42,105.24 153.42,105.94 147.74,111.62 143.6,111.62 136.7,118.52 v3(136.7,130.62) 147.66,130.62 148.44,131.4 157.08,131.4 157.116,131.436 J14.4@162.536,131.436 ; v3@162.74,92 v3(162.94,92.24) 163.208,91.972 P13.4@168.656,91.972
HSYNC_VGA: J10.13 U29.6 | length 14.3
  Top Layer w0.127: J10.13@146.812,81.28 147,81.28 148.2,82.48 153.18,82.48 154.9,84.2 U29.6@154.9,89.182
INT0: R8.2 U2.T15 U33.28 | length 147.8
  Top Layer w0.127: U33.28@56.13,119.637 54.745,119.637 54.494,119.888 54.494,121.055 54.92,121.481 54.92,123.5 55.48,124.06 v1(63.36,124.06) ; R8.2@65.19,125.984 65.38,125.794 v1(65.38,124.7) 65.9,125.22 69.18,125.22 69.44,125.48 70.82,125.48 71.26,125.04 72.8,125.04 73.12,125.36 73.12,126.5 73.326,126.706 80.026,126.706 80.42,127.1 80.42,127.336 v1(82.962,129.878) ; v1(80.32,149.56) 80.336,156.62 ; 80.34,156.62 80.34,158.1 v1(80.92,158.68) ; v1(81.9,138.38) 82.14,138.62 82.14,144.08 82.46,144.4 v1(82.68,144.4) ; U2.T15@107.95,149.352 107.95,149.36 107.954,149.356 v1(108.58,148.7) ; v1(117.46,154.36) 119.481,154.36 120.121,155 v1(120.56,155)
  Bottom Layer w0.127: v1(63.36,124.06) 64,124.7 v1(65.38,124.7) ; v1(80.32,149.56) 80.379,149.501 80.379,148.14 80.604,147.915 80.985,147.915 81.4,147.5 81.4,146.42 82.42,145.4 82.42,144.66 v1(82.68,144.4) ; v1(80.92,158.68) 80.76,158.68 80.26,159.18 80.26,161.68 82.78,164.2 88.32,164.2 89.9,162.62 90.54,162.62 91.08,163.16 94.726,163.16 97.926,166.36 99.38,166.36 100.186,165.554 121.146,165.554 123.56,163.14 123.56,162.58 122.534,161.554 122.534,159.404 121.178,158.048 121.178,156.885 121.054,156.761 121.054,155.494 v1(120.56,155) ; v1(81.9,138.38) 82.8,138.38 83.58,137.6 83.58,136.3 82.962,135.682 v1(82.962,129.878) ; v1(108.58,148.7) 108.58,149.22 109.26,149.9 109.26,150.22 109.68,150.64 110.02,150.64 110.46,151.08 110.46,151.52 112.78,153.84 116.94,153.84 v1(117.46,154.36)
INT1: R9.2 U2.U15 U3.8 | length 18.4
  Top Layer w0.127: U2.U15@109.22,149.352 109.22,149.36 v1(109.85,149.99) ; v1(116.94,149.22) 117.28,149.22 117.646,149.586 118.446,149.586 119.24,150.38 121.59,150.38 123.592,152.382 U3.8@125.008,152.382
  Bottom Layer w0.127: v1(109.85,149.99) 110.09,149.99 110.74,150.64 111.46,150.64 111.64,150.82 112.319,150.82 113.219,149.92 114.959,149.92 115.659,149.22 v1(116.94,149.22)
INT2: R10.2 U2.V16 | length 11.9
  Top Layer w0.127: U2.V16@110.49,150.622 110.49,150.63 v1(111.12,151.26) ; v1(115.98,149.74) 116.08,149.84 118.08,149.84 119.458,151.218 R10.2@120.904,151.218
  Bottom Layer w0.127: v1(111.12,151.26) 112.238,151.26 113.298,150.2 115.038,150.2 115.498,149.74 v1(115.98,149.74)
INT3: R11.2 R71.1 U2.W17 | length 77.7
  Top Layer w0.127: U2.W17@111.76,151.892 111.932,151.892 112.6,152.56 114.38,152.56 v1(114.56,152.38) ; v3(117.46,92.04) 121.64,92.04 v3(123.28,93.68)
  Bottom Layer w0.127: v1(114.56,152.38) 115.44,151.5 117.281,151.5 119.258,149.523 119.258,146.278 118.4,145.42 118.4,143.88 122.8,139.48 122.8,94.16 v3(123.28,93.68) v3@123.46,93.68 ; R71.1@116.332,89.242 116.332,91.274 R11.2@116.166,91.44 116.86,91.44 v3(117.46,92.04)
IRDA_SD: R34.1 U8.5 | length 3.6
  Top Layer w0.127: R34.1@170.522,178.816 171.554,179.848 U8.5@173.736,179.848
LVD0M: P12.5 U28.41 | length 13.6
  Top Layer w0.127: v3(164.92,97.08) 165.114,97.08 165.254,97.22 165.361,97.22 165.586,96.995 165.586,92.194 166.906,90.874 166.906,88.774 167.36,88.32 167.74,88.32 168.2,87.86 P12.5@169.013,87.86
  Bottom Layer w0.127: U28.41@163.504,97.31 164.51,97.31 164.74,97.08 v3(164.92,97.08)
LVD0P: P12.6 U28.40 | length 13.7
  Top Layer w0.127: v3(164.96,97.86) 165.08,97.86 165.84,97.1 165.84,92.3 167.16,90.98 167.16,88.88 167.46,88.58 167.7,88.58 168.23,89.11 P12.6@169.013,89.11
  Bottom Layer w0.127: U28.40@163.504,97.81 164.23,97.81 164.38,97.66 164.72,97.66 v3(164.96,97.86)
LVD1M: P12.8 U28.39 | length 11.6
  Top Layer w0.127: v3(165.88,97.84) 165.88,97.62 166.206,97.294 166.206,96.974 166.506,96.674 166.506,92.714 167.14,92.08 167.66,92.08 168.13,91.61 P12.8@169.013,91.61
  Bottom Layer w0.127: U28.39@163.504,98.31 164.45,98.31 164.546,98.406 165.974,98.406 166.18,98.2 166.18,97.98 ; v3(165.88,97.84) v3@166.12,97.98
LVD1P: P12.9 U28.38 | length 11.7
  Top Layer w0.127: v3(166.74,97.8) 166.74,97.66 166.46,97.38 166.46,97.12 166.76,96.82 166.76,92.82 167.24,92.34 167.64,92.34 168.16,92.86 P12.9@169.013,92.86
  Bottom Layer w0.127: U28.38@163.504,98.81 164.41,98.81 164.56,98.66 166.12,98.66 166.46,98.32 166.46,98.08 v3(166.74,97.8)
LVD2M: P12.11 U28.35 | length 9.4
  Top Layer w0.127: v3(165.8,100.12) 166.22,99.7 166.22,99.461 167.26,98.421 167.26,96.14 167.494,95.906 167.694,95.906 168.24,95.36 P12.11@169.013,95.36
  Bottom Layer w0.127: U28.35@163.504,100.31 164.47,100.31 164.58,100.42 165.74,100.42 165.8,100.36 v3@165.8,100
LVD2P: P12.12 U28.34 | length 9.7
  Top Layer w0.127: v3(166.58,100.28) 166.474,100.174 166.474,99.566 167.52,98.52 167.52,96.26 167.62,96.16 167.92,96.16 168.37,96.61 P12.12@169.013,96.61
  Bottom Layer w0.127: U28.34@163.504,100.81 164.47,100.81 164.606,100.674 166.186,100.674 v3(166.58,100.28) ; v3@166.585,100.281 v3@166.62,100.12
LVDS_DE: R140.2 R141.2 U28.25 | length 7.8
  Top Layer w0.127: v3(161.52,106.36) 161.52,106.822 R140.2@163.576,108.878 R141.2@165.608,108.878
  Bottom Layer w0.127: v3(161.52,106.36) 162.57,105.31 U28.25@163.504,105.31
LVDSVCC: C196.1 C198.2 L7.2 U28.37 | length 12.7
  Bottom Layer w0.127: C198.2@171.648,99.31 C198.2@171.91,99.048 ; C196.1@171.868,100.984 C196.1@171.91,100.942
  Bottom Layer w0.2: U28.37@163.504,99.31 C198.2@171.648,99.31 ; L7.2@171.72,103.124 171.91,102.934 C198.2@171.91,99.048
MCBVD1: P4.14 U2.A15 | length 31.1
  Top Layer w0.127: v1(87.6,149.02) 87.932,149.352 U2.A15@88.9,149.352
  Bottom Layer w0.127: P4.14@64.516,163.576 64.516,163.164 65.659,162.021 67.254,162.021 68.295,160.98 73.215,160.98 74.075,160.12 84.975,149.22 85.92,149.22 86.46,148.68 87.24,148.68 87.58,149.02 v1(87.6,149.02)
MCBVD2: P4.13 U2.B15 | length 34.6
  Top Layer w0.127: v1(86.9,149.26) 87.64,150 89.58,150 90.17,149.41 U2.B15@90.17,149.352
  Bottom Layer w0.127: P4.13@64.516,166.116 65.78,164.852 65.78,162.6 66.105,162.275 67.385,162.275 68.42,161.24 73.314,161.24 73.95,160.604 85.074,149.48 86.14,149.48 86.36,149.26 v1(86.9,149.26)
MCD1: P4.15 U2.B14 | length 37.1
  Top Layer w0.127: v1(85.8,148.52) 85.78,148.5 87.9,148.5 88.18,148.78 89.4,148.78 90.098,148.082 U2.B14@90.17,148.082
  Bottom Layer w0.127: P4.15@61.976,166.116 61.976,166.044 63.16,164.86 63.16,162.94 64.333,161.767 67.114,161.767 68.181,160.7 73.136,160.7 85.316,148.52 v1(85.8,148.52)
MCD2: P4.18 U2.C13 | length 39.8
  Top Layer w0.127: v1(90.8,147.45) 91.438,146.812 U2.C13@91.44,146.812
  Bottom Layer w0.127: P4.18@59.436,163.576 59.436,162.724 61.155,161.005 66.714,161.005 67.799,159.92 72.838,159.92 85.684,147.074 88.274,147.074 88.65,147.45 v1(90.8,147.45)
MCDIR: P4.11 U2.C14 | length 33
  Top Layer w0.127: v1(90.8,148.72) 90.802,148.72 U2.C14@91.44,148.082
  Bottom Layer w0.127: P4.11@67.056,166.116 67.056,165.844 68.24,164.66 68.24,163.06 69.48,161.82 73.453,161.82 85.236,150.037 87.803,150.037 89.119,148.72 v1(90.8,148.72)
MCLD: U2.A13 U19.1 | length 27.7
  Top Layer w0.127: U19.1@67.354,145.252 67.354,144.386 68.68,143.06 v3(68.86,143.06) ; v1(79.58,144.04) 79.58,145.02 80.34,145.78 80.34,147.5 80.62,147.78 81.16,147.78 81.52,147.42 86.82,147.42 87.12,147.12 88.592,147.12 U2.A13@88.9,146.812
  Bottom Layer w0.127: v3(68.86,143.06) 74.44,143.06 76.44,145.06 78.56,145.06 v1(79.58,144.04)
MCRS: U2.B12 U19.23 | length 18.9
  Top Layer w0.127: U19.23@74.204,151.602 76.542,151.602 v1(76.72,151.78) ; v1(80.88,147.26) 80.974,147.166 86.715,147.166 87.323,146.558 88.002,146.558 88.4,146.16 89.552,146.16 U2.B12@90.17,145.542 U2.B12@90.17,145.59
  Bottom Layer w0.127: v1(76.72,151.78) 76.72,151.44 v1(80.88,147.26)
MDC: U2.C8 U19.25 | length 28.7
  Top Layer w0.127: v1(72.78,151.98) 72.854,152.054 U19.25@72.854,153.452 ; v1(89.54,141.06) 90.842,141.06 U2.C8@91.44,140.462
  Bottom Layer w0.127: v1(72.78,151.98) 71.96,151.16 71.96,149.78 72.48,149.26 74.26,149.26 75.32,148.2 75.86,148.2 76,148.34 76.5,148.34 80.363,144.477 80.363,142.916 82.265,141.014 86.574,141.014 86.86,141.3 87.38,141.3 87.68,141 88.36,141 88.42,141.06 v1(89.54,141.06)
MDIO: U2.B8 U19.26 | length 31.2
  Top Layer w0.127: v1(71.86,152) 72.354,152.494 U19.26@72.354,153.452 ; v1(85.34,144.34) 85.34,143.1 85.02,142.78 85.02,142.028 87.108,139.94 89.66,139.94 90.17,140.45 U2.B8@90.17,140.47
  Bottom Layer w0.127: v1(71.86,152) 72.72,152.86 75.8,152.86 76.16,152.5 76.16,151.52 76.271,151.409 76.271,151.129 82.141,145.259 82.141,143.653 83.002,142.792 84.632,142.792 85.34,143.5 v1(85.34,144.34)
MRXCLK: U2.A8 U19.16 | length 18.7
  Top Layer w0.127: U19.16@74.204,148.102 75.118,148.102 75.364,147.856 v3@76.224,147.856 ; v3@76.221,147.824 v3(76.26,147.82) ; v1(87.14,140.76) 87.438,140.462 U2.A8@88.9,140.462
  Bottom Layer w0.127: v3(76.26,147.82) 76.549,147.82 77.797,146.572 80.109,144.26 80.109,142.811 82.16,140.76 v1(87.14,140.76)
MRXD0: U2.A9 U19.21 | length 23
  Top Layer w0.127: v1(72.84,150.62) 74.186,150.62 U19.21@74.204,150.602 ; v1(87.94,141.56) 88.112,141.732 U2.A9@88.9,141.732
  Bottom Layer w0.127: v1(72.84,150.62) 73.76,150.62 75.04,149.34 76.22,149.34 80.871,144.689 80.871,143.127 82.476,141.522 85.982,141.522 86.8,142.34 87.36,142.34 87.94,141.76 v1(87.94,141.56)
MRXD1: U2.B9 U19.20 | length 22.8
  Top Layer w0.127: U19.20@74.204,150.102 75.022,150.102 75.3,150.38 75.78,150.38 76.06,150.1 76.06,149.54 75.64,149.12 v3(75.64,148.82) ; v1(87.02,141.82) 87.58,142.38 89.52,142.38 90.168,141.732 U2.B9@90.17,141.732
  Bottom Layer w0.127: v3(75.64,148.82) 76.38,148.82 80.617,144.583 80.617,143.021 82.37,141.268 86.428,141.268 v1@86.98,141.82
MRXD2: U2.D9 U19.19 | length 24
  Top Layer w0.127: U19.19@74.204,149.602 75.162,149.602 v3(75.54,149.86) ; v1@92.08,142.362 U2.D9@92.71,141.732
  Bottom Layer w0.127: v3(75.54,149.86) 76.06,149.86 81.125,144.795 81.125,143.232 82.581,141.776 85.855,141.776 86.675,142.596 87.764,142.596 88.54,141.82 91.46,141.82 92.01,142.37 v1(92.07,142.37)
MRXD3: U2.C9 U19.18 | length 28.1
  Top Layer w0.127: v1(72.88,149.8) 72.88,149.44 73.218,149.102 U19.18@74.204,149.102 ; v1(90.8,142.4) 90.8,142.372 U2.C9@91.44,141.732
  Bottom Layer w0.127: v1(72.88,149.8) 72.26,150.42 72.26,150.98 72.52,151.24 74.2,151.24 75.06,150.38 75.919,150.38 81.379,144.92 81.379,143.337 82.686,142.03 85.75,142.03 86.58,142.86 88.079,142.86 88.339,142.6 88.539,142.4 v1(90.8,142.4)
MRXERR: U2.B10 U19.24 | length 22.3
  Top Layer w0.127: U19.24@74.204,152.102 75.362,152.102 v1(75.58,152.32) ; v1(86.1,143.06) 86.296,143.256 87.956,143.256 88.34,143.64 89.58,143.64 90.17,143.05 U2.B10@90.17,143.002
  Bottom Layer w0.127: v1(75.58,152.32) 75.58,151.741 76.017,151.304 76.017,151.023 81.887,145.153 81.887,143.547 82.896,142.538 84.778,142.538 85.3,143.06 v1(86.1,143.06)
MRXVAL: U2.A10 U19.22 | length 20
  Top Layer w0.127: U19.22@74.204,151.102 75.378,151.102 75.378,151.022 v1(75.5,150.9) ; v1(85.54,142.56) 87.218,142.56 87.66,143.002 U2.A10@88.9,143.002
  Bottom Layer w0.127: v1(75.5,150.9) 75.773,150.9 81.633,145.04 81.633,143.442 82.791,142.284 85.334,142.284 85.68,142.63 v1(85.54,142.56)
MTXCLK: U2.C10 U19.7 | length 30.2
  Top Layer w0.127: U19.7@70.354,145.252 70.354,144.186 72.1,142.44 79.08,142.44 80.24,143.6 80.24,145.14 82.012,146.912 86.61,146.912 87.502,146.02 v1(87.74,146.02) ; v1(90.8,143.64) 91.438,143.002 U2.C10@91.44,143.002
  Bottom Layer w0.127: v1(87.74,146.02) 87.5,145.9 87.12,145.9 86.76,145.54 86.76,144.74 86.92,144.58 86.92,143.82 87.26,143.48 87.98,143.48 88.14,143.64 v1(90.8,143.64)
MTXD0: U2.C11 U19.6 | length 27.4
  Top Layer w0.127: U19.6@69.854,145.252 69.854,144.306 71.98,142.18 79.196,142.18 79.196,142.186 80.496,143.486 80.496,145.036 82.117,146.658 86.194,146.658 87.28,145.572 v1(87.28,145.32) v1@87.229,145.363 ; v1(90.8,144.91) 91.438,144.272 U2.C11@91.44,144.272
  Bottom Layer w0.127: v1(87.28,145.32) 87.69,144.91 v1(90.8,144.91)
MTXD1: U2.B11 U19.5 | length 26.8
  Top Layer w0.127: U19.5@69.354,145.252 69.354,144.426 71.86,141.92 79.31,141.92 80.755,143.365 80.755,144.937 82.222,146.404 85.996,146.404 86.68,145.72 86.68,145.18 87.066,144.794 88.654,144.794 88.72,144.86 89.58,144.86 90.168,144.272 U2.B11@90.17,144.272 U2.B11@90.17,144.35
MTXD2: U2.A11 U19.4 | length 25.9
  Top Layer w0.127: U19.4@68.854,145.252 68.854,144.426 69.077,144.203 69.217,144.203 71.76,141.66 79.424,141.66 79.424,141.666 81.014,143.256 81.014,144.837 82.328,146.15 85.882,146.15 86.412,145.62 86.412,145.088 86.96,144.54 88.632,144.54 U2.A11@88.9,144.272
MTXD3: U2.D10 U19.3 | length 31.9
  Top Layer w0.127: U19.3@68.354,145.252 68.354,144.406 68.811,143.949 69.091,143.949 71.64,141.4 79.538,141.4 81.297,143.159 81.297,144.761 82.433,145.896 85.764,145.896 86.158,145.502 86.158,144.582 v1(86.4,144.34) ; v1(92.06,143.64) 92.072,143.64 U2.D10@92.71,143.002
  Bottom Layer w0.127: v1(86.4,144.34) 86.4,143.7 86.92,143.18 88.32,143.18 88.48,143.02 91.46,143.02 92.06,143.62 v1(92.06,143.64)
MTXEN: U2.D11 U19.2 | length 32.1
  Top Layer w0.127: U19.2@67.854,145.252 67.854,144.466 68.725,143.595 69.065,143.595 71.52,141.14 79.672,141.14 81.557,143.031 81.557,143.036 ; 81.551,143.036 81.551,144.655 82.538,145.642 85.654,145.642 85.88,145.416 85.88,144.12 86.18,143.82 87.26,143.82 v1(87.46,144.02) ; v1(92.07,144.91) 92.708,144.272 U2.D11@92.71,144.272
  Bottom Layer w0.127: v1(87.46,144.02) 87.7,144.26 91.5,144.26 92.07,144.83 v1(92.07,144.91)
MTXERR: U2.A12
NetB1_+: B1.+ C5.2 U3.2 | length 104.6
  Top Layer w0.127: 58.078,169.102 C5.2@58.078,169.672
  Top Layer w0.2: B1.+@51.068,172.172 55.578,172.172 C5.2@58.078,169.672 ; 58.078,169.102 59.02,168.16 82.66,168.16 87.98,173.48 v2(89.12,173.48) ; U3.2@125.008,156.282 v2(126.78,156.28)
  Bottom Layer w0.127: v2(126.78,156.28) 127.04,156.28 127.2,156.44
  Bottom Layer w0.2: v2(89.12,173.48) 93.78,173.48 95,174.7 106.48,174.7 109.22,177.44 119.24,177.44 124.32,172.36 126.86,172.36 129.26,169.96 129.26,157.06 128.64,156.44 127.2,156.44
NetC1_2: C1.2 R3.2 U2.P17 Y1.1 | length 28.1
  Top Layer w0.127: v1(101.22,159.34) 102.32,159.34 104.56,161.58 106.7,161.58 106.88,161.76 106.88,162.84 106.652,163.068 101.942,163.068 C1.2@101.434,163.576 R3.2@101.434,165.608 ; U2.P17@105.41,151.892 105.41,151.9 v1(106.04,152.53)
  Bottom Layer w0.127: v1(101.22,159.34) 101.56,159.68 104.392,159.68 106.68,157.392 106.68,153.22 106.04,152.58 v1(106.04,152.53)
NetC2_2: C2.2 R3.1 U2.N17 Y1.4 | length 28.4
  Top Layer w0.127: R3.1@99.734,165.608 99.91,165.608 C2.2@101.434,167.132 104.054,167.132 Y1.4@104.618,166.568 105.712,166.568 107.32,164.96 107.32,161.8 106.72,161.2 104.98,161.2 v1(102.42,158.64) ; U2.N17@104.14,151.892 104.14,151.9 v1(104.77,152.53)
  Bottom Layer w0.127: v1(102.42,158.64) 104.18,158.64 105.82,157 105.82,156 105.5,155.68 105.5,153.18 104.85,152.53 v1(104.77,152.53)
NetC51_1: C51.1 R26.2 U4.5 | length 4.5
  Top Layer w0.25: R26.2@15.24,132.93 18.29,132.93 18.714,132.506 U4.5@19.584,132.506
NetC62_1: C62.1 R31.2 R32.1 U4.4 | length 7.6
  Top Layer w0.25: U4.4@24.384,132.506 25.154,132.506 26.938,130.722 R32.1@27.432,130.722 27.598,130.556 C62.1@27.598,127
NetC71_1: C71.1 U7.1 | length 4
  Top Layer w0.2: U7.1@145.007,170.953 146.287,170.953 146.74,170.5 146.74,169.91 C71.1@147.828,168.822
NetC71_2: C71.2 U7.3 | length 3.5
  Top Layer w0.2: U7.3@145.007,172.253 146.097,172.253 C71.2@147.828,170.522
NetC72_1: C72.1 U7.4 | length 3
  Top Layer w0.2: U7.4@145.007,172.903 147.303,172.903 C72.1@147.828,172.378
NetC72_2: C72.2 U7.5 | length 3
  Top Layer w0.2: U7.5@145.007,173.553 147.303,173.553 C72.2@147.828,174.078
NetC74_2: C74.2 C77.2 R36.1 R37.1 R38.1 U8.6 | length 11.2
  Top Layer w0.2: R38.1@165.888,181.094 170.626,181.094 170.872,180.848 U8.6@173.736,180.848
  Bottom Layer w0.127: C77.2@170.204,180.822 C77.2@170.23,180.848
  Bottom Layer w0.2: C77.2@170.204,180.822 C74.2@170.204,182.812 ; C77.2@170.23,180.848 v3(171.44,180.848)
NetC75_2: C75.2 U7.2 | length 4.8
  Top Layer w0.2: C75.2@142.582,168.656 142.582,170.642 143.543,171.603 U7.2@145.007,171.603
NetC76_2: C76.2 U7.6 | length 3.1
  Top Layer w0.127: v3(143.22,173.9) 143.523,174.203 U7.6@145.007,174.203
  Bottom Layer w0.127: C76.2@142.24,173.394 142.746,173.9 v3(143.22,173.9)
NetC79_1: C79.1 U9.1 | length 3.8
  Top Layer w0.127: U9.1@160.755,170.953 U9.1@161.687,170.953
  Top Layer w0.2: U9.1@161.687,170.953 163.576,169.064 C79.1@163.576,168.822
NetC79_2: C79.2 U9.3 | length 3.6
  Top Layer w0.127: U9.3@160.755,172.253 161.947,172.253
  Top Layer w0.2: 161.947,172.253 163.576,170.624 C79.2@163.576,170.522
NetC80_1: C80.1 U9.4 | length 3
  Top Layer w0.2: U9.4@160.755,172.903 163.051,172.903 C80.1@163.576,172.378
NetC80_2: C80.2 U9.5 | length 3
  Top Layer w0.2: U9.5@160.755,173.553 163.051,173.553 C80.2@163.576,174.078
NetC81_2: C81.2 U9.2 | length 4.9
  Top Layer w0.2: C81.2@158.33,168.656 158.33,170.83 159.103,171.603 U9.2@160.755,171.603
NetC82_2: C82.2 U9.6 | length 3.8
  Top Layer w0.2: v3(158.86,174.12) 158.943,174.203 U9.6@160.755,174.203
  Bottom Layer w0.127: C82.2@157.48,172.886 158.714,174.12 v3(158.86,174.12)
NetC84_1: C84.1 U13.1 | length 3.8
  Top Layer w0.127: U13.1@160.247,157.745 U13.1@161.135,157.745
  Top Layer w0.2: U13.1@161.135,157.745 163.068,155.812 C84.1@163.068,155.614
NetC84_2: C84.2 U13.3 | length 3.6
  Top Layer w0.2: U13.3@160.247,159.045 161.515,159.045 163.068,157.492 C84.2@163.068,157.314
NetC85_1: C85.1 U13.4 | length 3
  Top Layer w0.2: U13.4@160.247,159.695 162.543,159.695 C85.1@163.068,159.17
NetC85_2: C85.2 U13.5 | length 3
  Top Layer w0.2: U13.5@160.247,160.345 162.543,160.345 C85.2@163.068,160.87
NetC86_2: C86.2 U13.2 | length 4.7
  Top Layer w0.2: C86.2@157.822,155.448 157.822,157.242 158.975,158.395 U13.2@160.247,158.395
NetC87_2: C87.2 U13.6 | length 3.4
  Top Layer w0.2: v3(158.415,160.995) U13.6@160.247,160.995
  Bottom Layer w0.127: C87.2@156.972,160.694 157.273,160.995 v3(158.415,160.995)